# Altium PCB PCB1.PcbDoc
Units mil, origin at the board's own origin, x right, y up, seen from the top; angles counter-clockwise.
Board outline 3752.19 x 2089.94 mil, 2 copper layers (Top Layer, Bottom Layer), stack 61.756 mil thick; 22 components, 12 nets, 54 pads, 178 vias.
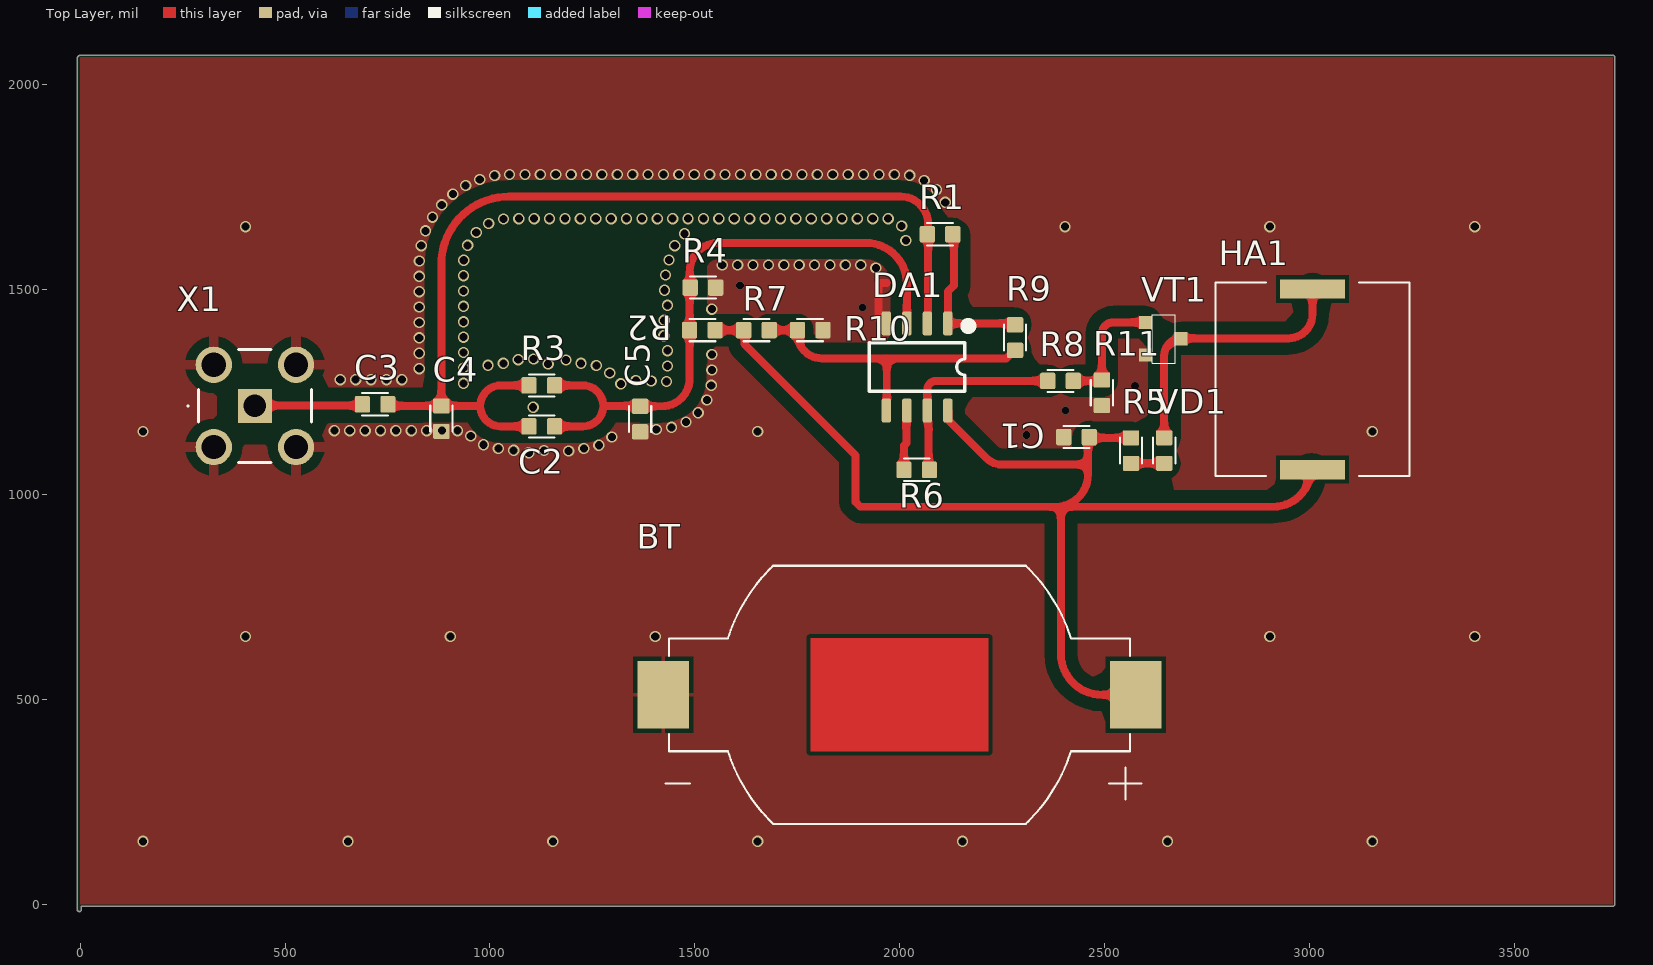
[diagram p0: Top Layer view]
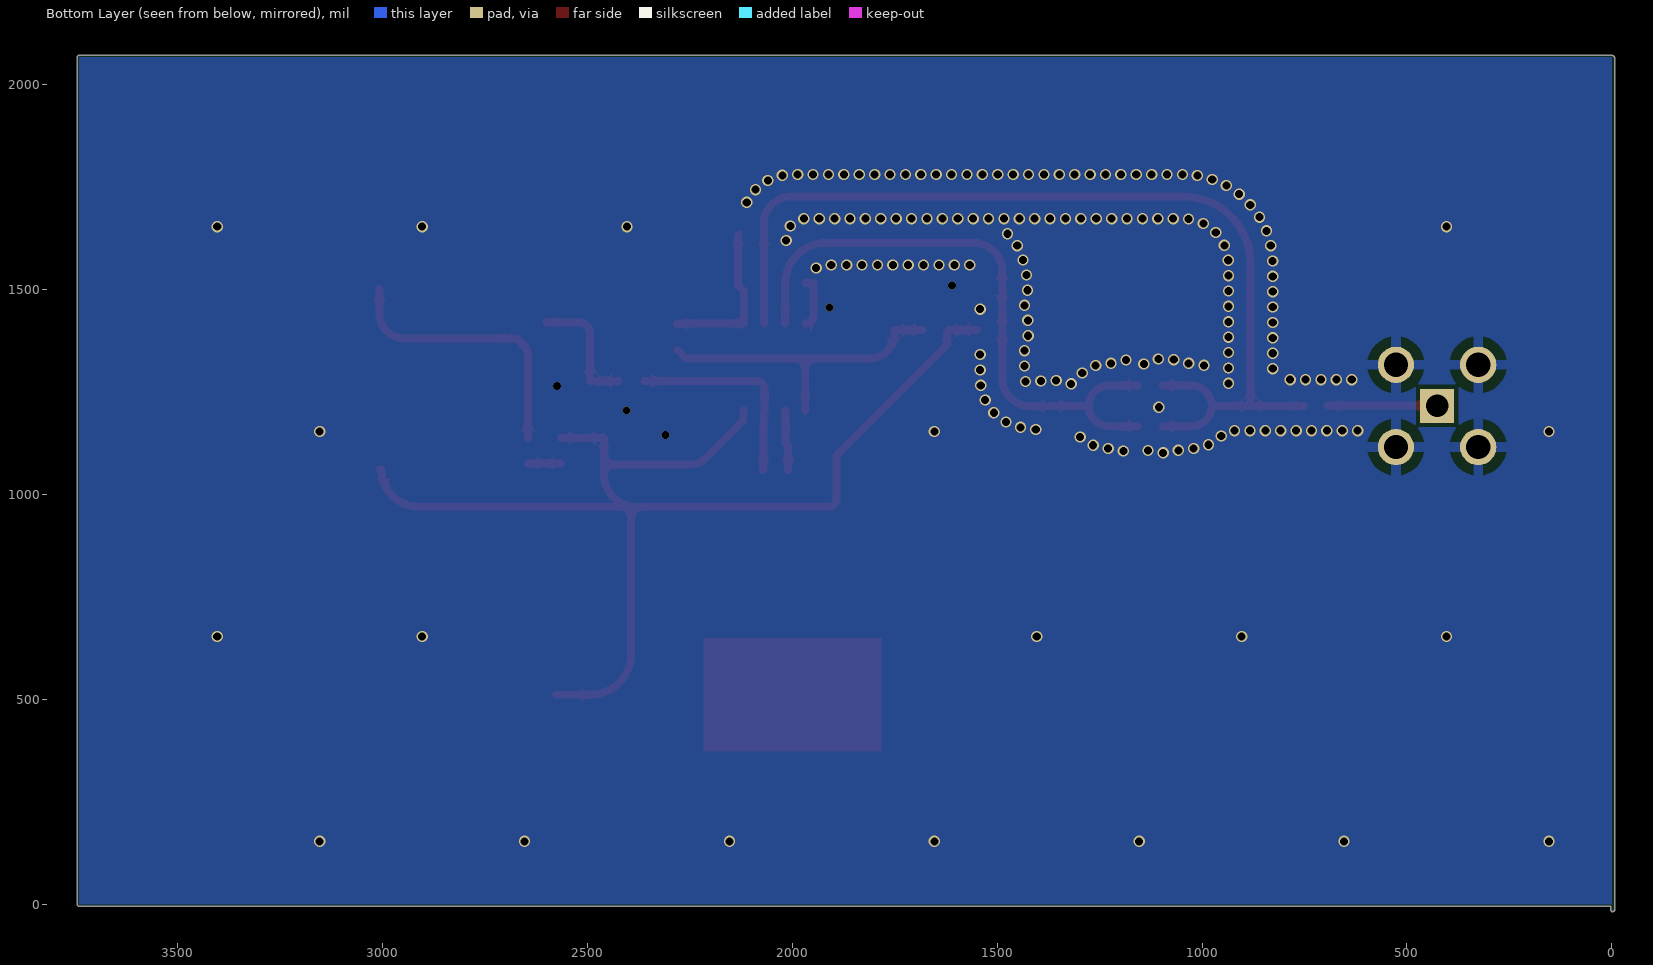
[diagram p1: Bottom Layer view, seen from below]
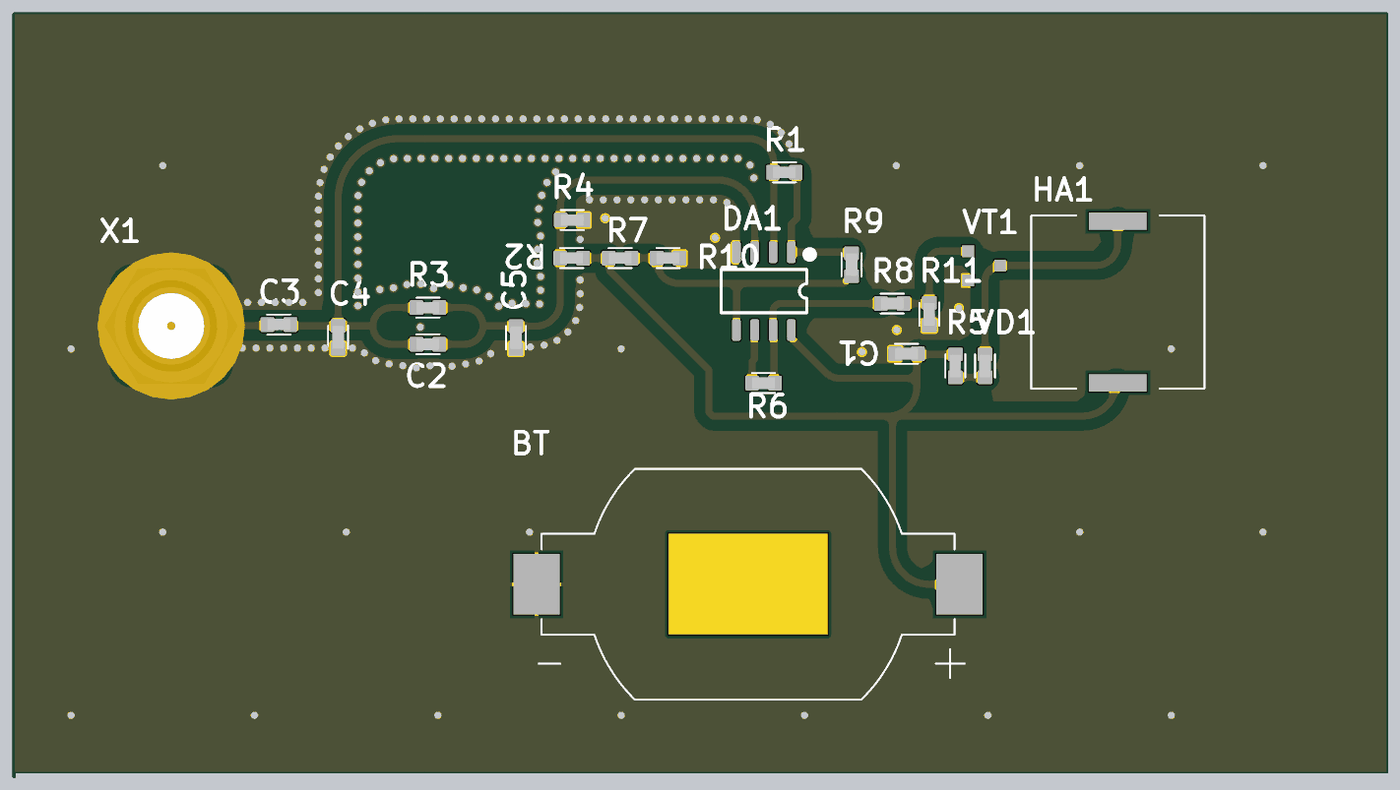
[diagram p2: 3D render of the assembled board from above, using the file's embedded part models]

## Layer stack, top to bottom
Top Solder: solder mask 1, SM-001, Dk 4
Top Layer: signal copper 1.378
Dielectric 1: core 59, Core-043, Dk 4.3
Bottom Layer: signal copper 1.378
Bottom Solder: solder mask 1, SM-001, Dk 4

## Board outline
-7.02,-13 -7.02,2064.93 cw(c-2,2064.93) -4.4,2069.33 cw(c0,2066.93) 0,2071.94 3740.16,2071.94 cw(c3740.16,2066.93) 3745.17,2066.93 3745.17,0 cw(c3740.16,0) 3740.16,-5.02 3.01,-5.02 3.01,-13 cw(c-2,-13)

## Design rules (kind name [scope] priority, off if disabled: settings)
Clearance [All] p1: gap=10 ignorepadtopadclearanceinfootprint=FALSE except(0: Arc-Hole Track-Hole SMDPad-Hole THPad-Hole Via-Hole Fill-Hole Poly-Hole Region-Hole Text-Hole; 30: Arc-Fill Arc-Poly Arc-Region Track-Fill Track-Poly Track-Region)
PolygonConnect [All] p1: connectstyle=Relief reliefconductorwidth=10 reliefentries=4 polygonreliefangle="90 Angle" airgapwidth=10
RoutingVias [All] p1: holewidth=28 width=50 viastyle="Through Hole" minholewidth=28 minwidth=50 maxholewidth=28 maxwidth=50
SolderMaskExpansion [All] p1: expansion=4 istentingtop=FALSE
Width [All] p1: maxlimit=19.25 minlimit=10 preferedwidth=19.25 impedanceprofiledriven=TRUE impedanceprofileid={F9868DF9-8A68-4A76-9D6B-6893FEEC8E06} impedanceprofilevalue=50.000000 minimp=50.000000 maximp=50.000000 favimp=50.000000 checkconnectedcopper=TRUE
30 further rules are at their usual default settings.

## Components (designator, comment, footprint, x,y, rotation, side; value= is the part's Value field where it differs from the comment)
BT "BU2032SM-G" BAT_BU2032SM-G 1999.57,511.15 r180 top
C1 "100u" RESC0603 2431.57,1140.15 r0 top
C2 "0.22u" RESC0603 1126.57,1166.15 r0 top
C3 "22" RESC0603 720,1220 r0 top
C4 "22" RESC0603 881.57,1185.15 r90 top
C5 "100u" RESC0603 1366.57,1184.15 r90 top
DA1 "LM358" SOIC-8 2042.57,1311.15 r270 top
HA1 "=Value" PKLCS1212E4001 3007.57,1281.15 r90 top
R1 "90k" RESC0603 2098.57,1635.15 r0 top
R2 "270k" RESC0603 1518.47,1401.15 r0 top
R3 "1k" RESC0603 1126.57,1266.15 r0 top
R4 "90k" RESC0603 1520,1505 r180 top
R5 "6k" RESC0603 2564.57,1107.15 r90 top
R6 "270k" RESC0603 2041.57,1060.15 r180 top
R7 "270k" RESC0603 1650.57,1401.15 r180 top
R8 "90k" RESC0603 2392.57,1277.15 r0 top
R9 "90k" RESC0603 2281.57,1383.05 r270 top
R10 "270k" RESC0603 1781.57,1401.15 r180 top
R11 "90k" RESC0603 2493.57,1248.15 r90 top
VD1 "=Value" RESC0603 2645.57,1107.15 r270 top
VT1 "BC817-40" SOT-23 2599.57,1340.15 r90 top
X1 "=Value" CONSMA008G 426.57,1216.15 r0 top

## Footprints (in the part's own frame and the unit in brackets; to place one, negate y for a bottom-side part, rotate by r counter-clockwise, add the part's x,y. Pads: shape width x height; smd on the part's side, far side on the other; paste and mask are expansions set on the pad)
BAT_BU2032SM-G [mm]
  rect 3.2x4.2 smd: NEG(14.65,0) POS(-14.65,0)
  Top Layer region: 5.5,-3.5 -5.5,-3.5 -5.5,3.5 5.5,3.5
  silkscreen extent -15,-8 14.5,8
CONSMA008G [mm]
  rect 2.1x2.1 hole 1.4: 1(0,0)
  round 2.25 hole 1.5: 2(-2.55,-2.55) 3(2.55,-2.55) 4(2.55,2.55) 5(-2.55,2.55)
  silkscreen extent -4.2,-3.5 3.5,3.5, body extent -5.1,-5.1 5.1,5.1, height 14
PKLCS1212E4001 [mm]
  rect 1.2x4 smd: 1(-5.6,0) 2(5.6,0)
  silkscreen extent -6,-6 6,6
RESC0603 [mm]
  rrect20% 0.94x1.02 smd: 1(-0.79,0) 2(0.79,0)
  silkscreen extent -0.8,-0.69 0.8,0.69, body extent -0.8,-0.4 0.8,0.4, height 0.43
SOIC-8 [mm] "SOIC-8 узкий"
  rrect50% 1.5x0.6 smd: 1(-2.7,1.905) 2(-2.7,0.635) 3(-2.7,-0.635) 4(-2.7,-1.905) 5(2.7,-1.905) 6(2.7,-0.635) 7(2.7,0.635) 8(2.7,1.905)
  silkscreen extent -2.64,-2.96 1.5,3.27, body extent -1.91,-2.54 1.91,2.54, height 1.75
SOT-23 [mil]
  rect 32x32 smd: 1(0,0) 2(80,0) 3(40,-87)
  silkscreen extent -20,-72 98,-17

## Part data
BT: "BATTERY HOLDER COIN 20MM SMD", Package=None, Availability=Unavailable, MF=MPD, MP=BU2032SM-G, Price=None, SnapEDA_Link=https://www.snapeda.com/parts/BU2032SM-G/Memory%20Protection%20Devices/view-part/4219599/?ref=snap
C1 C2 C3 C4 C5: library part Cap-SMD-0603, "Конденсатор СМД", Case=0603, TypeCase=СМД, GOSTGroup=Конденсаторы, TypeMaterial=керам
DA1: library part LM1458, "Микросхема, операционный усилитель"
HA1: library part SMA-24L-P10, "Пьезоизлучатель"
R1 R2 R3 R4 R5 R6 R7 R8 R9 R10 R11: library part Res-0603-0.25W, "Резистор СМД", PowerRating=0.25Вт, GOSTGroup=Резисторы, PPM=5%
VD1: library part Led, "Светодиод"
VT1: library part "Transistor NPN", "Транзистор биполярный  NPN"
X1: library part "Header 5M", "Разъем 5, папа"

## Via types
v1: diameter 27.56, hole 19.68, Top Layer to Bottom Layer, tented both sides, 173 vias
v2: diameter 19.68, hole 19.68, Top Layer to Bottom Layer, 5 vias

## Nets (pads, with @x,y where several pads share a name; then routed paths per layer and width w, separated by ;. In a path a pad name is that pad's centre, name@x,y a point inside that pad or via, vN(x,y) a via of type N, cw(c..) or ccw(c..) an arc to the next point about the centre after c; other vN are vias at no path point)
GND: BT.NEG C1.1 C4.1 C5.1 DA1.4 R4.1 R10.1 R11.1 VT1.1 X1.2 X1.3 X1.4 X1.5 | length 128.7
  Top Layer w19.25: DA1.4 cw(c1967.57,1436.2) 1948.82,1436.2 1948.82,1515.75 1968.5,1515.75
  other v1: 153.54,153.54 653.54,153.54 1153.54,153.54 1653.54,153.54 2153.54,153.54 2653.54,153.54 3153.54,153.54 403.54,653.54 903.54,653.54 1403.54,653.54 2903.54,653.54 3403.54,653.54 1095,1101.61 1192.18,1106.13 1132.12,1107.36 1057.96,1107.86 1020.69,1112.44 1229.23,1112.29 1265.95,1120.18 984.19,1121.34 1297.62,1140.36 953.32,1142.72 153.54,1153.54 1653.54,1153.54 3153.54,1153.54 620.37,1155.84 657.93,1155.84 695.49,1155.84 733.05,1155.84 770.61,1155.84 808.17,1155.84 845.73,1155.84 883.29,1155.84 920.85,1155.84 1405.96,1158.71 1443.18,1163.77 1478.45,1176.67 1508.24,1199.54 1105.71,1212.94 1529.46,1230.53 1540.3,1266.49 1319.46,1270.12 935.55,1271.26 1431.22,1275.99 1393.67,1276.81 1356.13,1278.22 634.89,1280.22 672.45,1280.22 710,1280.22 747.56,1280.22 785.12,1280.22 1292.52,1296.29 1541.55,1304.03 827.6,1307.15 935.55,1308.82 1433.6,1313.47 1259.7,1314.56 995.49,1315.18 1142.14,1318.24 1032.73,1320.12 1222.55,1320.12 1185.91,1328.36 1069.18,1329.16 1106.71,1330.69 1541.55,1341.59 827.6,1344.71 935.55,1346.38 1433.6,1351.03 827.6,1382.27 935.55,1383.93 1424.4,1387.45 827.6,1419.83 935.55,1421.49 1425.24,1425 1541.55,1452.31 827.6,1457.39 935.55,1459.05 1433.6,1461.61 827.6,1494.94 935.55,1496.61 1425.93,1498.38 827.6,1532.5 935.55,1534.17 1428.64,1535.84 1941.94,1552.96 1567.05,1560.18 1604.61,1560.18 1642.17,1560.18 1679.72,1560.18 1717.28,1560.18 1754.84,1560.18 1792.4,1560.18 1829.96,1560.18 1867.52,1560.18 1905.08,1560.18 827.84,1570.06 936.27,1571.72 1437.01,1572.46 832.49,1607.33 1451.1,1607.28 945.76,1608.06 2015,1620 1474.88,1636.34 966.77,1639.19 843.1,1643.36 403.54,1653.54 2403.54,1653.54 2903.54,1653.54 3403.54,1653.54 2004.88,1655.04 997.02,1661.46 1033.03,1672.14 1070.57,1673.18 1108.13,1673.18 1145.69,1673.18 1183.25,1673.18 1220.81,1673.18 1258.37,1673.18 1295.93,1673.18 1333.49,1673.18 1371.05,1673.18 1408.6,1673.18 1446.16,1673.18 1483.72,1673.18 1521.28,1673.18 1558.84,1673.18 1596.4,1673.18 1633.96,1673.18 1671.52,1673.18 1709.08,1673.18 1746.64,1673.18 1784.2,1673.18 1821.75,1673.18 1859.31,1673.18 1896.87,1673.18 1934.43,1673.18 1971.99,1673.18 860.09,1676.86 882.56,1706.95 2111.28,1713 909.6,1733.02 2089.84,1743.84 940.8,1753.93 2059.87,1766.48 975.22,1768.97 1011.61,1778.27 2024.47,1779.02 1047.99,1781.12 1085.55,1781.12 1123.11,1781.12 1160.67,1781.12 1198.22,1781.12 1235.78,1781.12 1273.34,1781.12 1310.9,1781.12 1348.46,1781.12 1386.02,1781.12 1423.58,1781.12 1461.14,1781.12 1498.7,1781.12 1536.26,1781.12 1573.82,1781.12 1611.37,1781.12 1648.93,1781.12 1686.49,1781.12 1724.05,1781.12 1761.61,1781.12 1799.17,1781.12 1836.73,1781.12 1874.29,1781.12 1911.85,1781.12 1949.41,1781.12 1986.97,1781.12
  other v2: 2310,1145 2405,1205 2574.46,1264.74 1909.45,1456.69 1610,1510
NetC2_1: C2.1 C3.2 C4.2 DA1.2 R1.1 R3.1 | length 2430.2
  Top Layer w19.25: C3.2@751.1,1216.15 976.57,1216.15 ; C4.2 881.57,1562.15 cw(c1046.57,1562.15) 1046.57,1727.15 2002.57,1727.15 cw(c2002.57,1660.15) 2069.57,1660.15 2069.57,1419.45 DA1.2 ; C2.1 1026.57,1166.15 cw(c1026.57,1216.15) 976.57,1216.15 ; R3.1 1026.57,1266.15 ccw(c1026.57,1216.15) 976.57,1216.15
NetC2_2: C2.2 C5.2 DA1.3 R2.1 R3.2 R4.2 | length 1532.6
  Top Layer w19.25: C2.2 1226.57,1166.15 ccw(c1226.57,1216.15) 1276.57,1216.15 ; R3.2 1226.57,1266.15 cw(c1226.57,1216.15) 1276.57,1216.15 ; C5.2@1366.57,1216.15 1276.57,1216.15 ; C5.2@1368.47,1217.15 C5.2 1419.39,1215.25 1419.48,1215.25 ccw(c1419.48,1283.37) 1487.57,1284.9 1487.57,1401.15 1487.57,1502.25 R4.2@1485.68,1504.15 ; R4.2@1487.79,1504.15 1487.79,1544.35 cw(c1557.6,1544.35) 1557.6,1614.15 1917.57,1614.15 cw(c1917.57,1514.15) 2017.57,1514.15 DA1.3
NetC3_1: C3.1 X1.1 | length 267.9
  Top Layer w19.25: X1.1 cw(c427.57,1216.15) 427.57,1217.15 C3.1@693.9,1217.15
NetDA1_5: DA1.5 R7.1 R9.2 R10.2 | length 779.2
  Top Layer w19.25: R7.1 R10.2 1750.47,1392.15 ccw(c1810.47,1392.15) 1810.47,1332.15 1968.57,1332.15 ; DA1.5 ccw(c1967.57,1205.85) 1968.57,1205.85 1968.57,1332.15 ; R9.2 2280,1351.94 2260.2,1332.15 1968.57,1332.15
NetDA1_6: DA1.6 R6.2 | length 147.6
  Top Layer w19.25: R6.2 2010.47,1119.15 2016.57,1125.25 2016.57,1203.85 DA1.6
NetDA1_7: DA1.7 R6.1 R8.1 | length 504
  Top Layer w19.25: R6.1 2070.57,1062.25 2070.57,1177.59 2069.76,1178.4 2069.76,1202.67 DA1.7 2067.57,1256.15 cw(c2088.57,1256.15) 2088.57,1277.15 R8.1
NetHA1_2: HA1.2 VD1.1 VT1.3 | length 681.9
  Top Layer w19.25: VD1.1 2645.57,1339.15 cw(c2686.57,1339.15) VT1.3 2687.57,1381.15 2948.57,1381.15 ccw(c2948.57,1440.15) 3007.57,1440.15 HA1.2
NetLabel1: DA1.1 R1.2 R9.1 | length 391
  Top Layer w19.25: R1.2 2132.57,1632.25 2132.57,1510.36 2117.57,1495.36 2117.57,1489.15 DA1.1 2278.28,1417.45 cw(c2278.28,1414.15) R9.1
NetR5_1: R5.1 VD1.2 | length 81
  Top Layer w19.25: R5.1 VD1.2
NetR8_2: R8.2 R11.2 VT1.2 | length 306
  Top Layer w19.25: R8.2 2491.47,1277.15 ccw(c2491.47,1279.25) R11.2 2493.57,1392.15 cw(c2521.57,1392.15) 2521.57,1420.15 VT1.2
Vcc: BT.POS C1.2 DA1.8 HA1.1 R2.2 R5.2 R7.2 | length 3087.7
  Top Layer w19.25: R2.2 R7.2 1622.4,1398.22 1622.4,1365.33 1892.57,1095.15 1892.57,981.43 1903.85,970.15 2393.59,970.15 ; DA1.8 2119.76,1202.67 2119.76,1180.84 2212.01,1088.59 ccw(c2249.28,1125.85) 2249.28,1073.15 2459.57,1073.15 ; R5.2 2464.57,1138.25 cw(c2464.57,1140.15) C1.2 2459.57,1137.05 2459.57,1073.15 ; BT.POS 2493.59,511.15 cw(c2493.59,611.15) 2393.59,611.15 2393.59,970.15 ; HA1.1 3002.65,1060.68 cw(c2912.12,1060.68) 2912.12,970.15 2393.59,970.15 ; 2393.59,970.15 2393.59,971.08 ccw(c2381.57,1048.15) 2459.57,1048.15 2459.57,1073.15

## Polygon pours and split planes (outlines as drawn)
GND on Top Layer "GND_L01_P000" (solid, pour order 0): 0,0 0,2066.93 3740.16,2066.93 3740.16,0
GND on Bottom Layer "GND_L02_P001" (solid, pour order 1): 0,0 0,2066.93 3740.16,2066.93 3740.16,0

## Other copper
Top Layer:
  pour cut-out: 2065,981.45 2065,1160.24 2149.76,1160.23 2241.57,1068.43 2241.57,981.45
  pour cut-out: 1800,1146.45 1800,1325.23 1951.57,1325.24 1951.57,1146.45
  pour cut-out: 1530,1320 1445,1320 1445,1596.61 1530,1596.61
  pour cut-out: 925,1615 925,1700 2046.61,1700 2046.61,1615 1447.72,1635.28 1452.09,1257.51 925,1259.99
  pour cut-out: 1050,1126.45 1050,1305.24 1226.57,1305.24 1226.57,1126.45
  pour cut-out: 460,1175 460,1260 836.61,1260 836.61,1175
  pour cut-out: 511.81,1122.05 334.65,1122.05 334.65,1318.9 511.81,1318.9

## Silkscreen, mask and mechanical layers (free items; w line width, h text height)
Mechanical 15:
  lines w10: -2,-13 -2,2064.93 0,2066.93 3740.16,2066.93 3740.16,0 0,0